# EAGLE board Battery Shield (EAGLE 6.5.0)
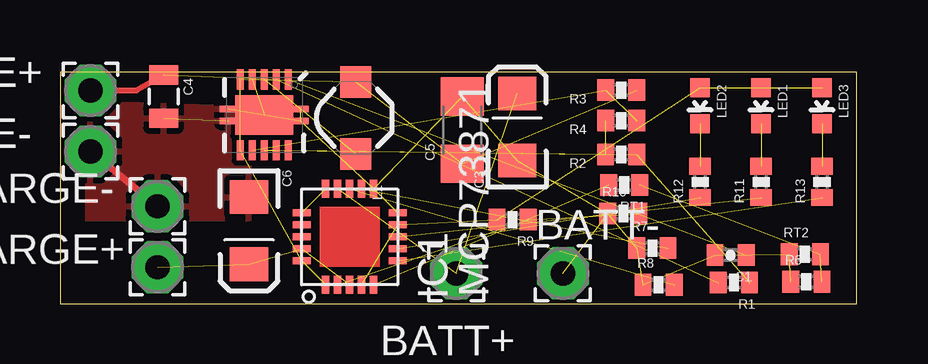
[diagram p0: board, top side]
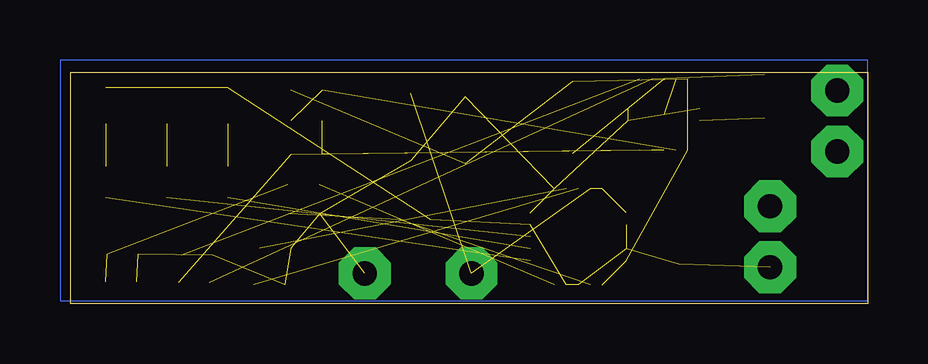
[diagram p1: board, bottom side, seen from below]

Size 33.2 x 9.64 mm. Coordinates in mm from the lower left corner, seen from the top.
Outline: 0,0 33.2,0 33.2,9.64 0,9.64 0,0
Copper layers (1*16): Top 0.035mm / dielectric 1.5mm / Bottom 0.035mm
Design rules "default": minimum track width 10mil, minimum drill 24mil, track to track 8mil, track to pad 8mil, pad to pad 8mil, via to via 8mil, smd to smd 8mil, copper to edge 40mil, drill to drill 8mil, minimum pad ring 10mil, minimum via ring 8mil, stop-mask expansion 4mil, vias tented up to drill 0mil, thermal gap 10mil

## Footprints (pad centres in the part's own frame; a part is rotated, then mirrored left to right if it is on the bottom)
2,15/1,0 = drill 1.016 pad 2.159 octagon: 1 0,0
0402-CAP = smd 0.7 x 0.9: 1 -0.65,0; 2 0.65,0
EIA3216 = smd 1.4 x 1.6: A 1.4,0; C -1.4,0
0805 = smd 0.8 x 1.2: 1 -0.9,0; 2 0.9,0
1206 = smd 1.6 x 1.8: 1 -1.4,0; 2 1.4,0
QFN20 = smd 0.75 x 0.3: 1 -2,1; 2 -2,0.5; 3 -2,0; 4 -2,-0.5; 5 -2,-1; 11 2,-1; 12 2,-0.5; 13 2,0; 14 2,0.5; 15 2,1 | smd 0.3 x 0.75: 6 -1,-2; 7 -0.5,-2; 8 0,-2; 9 0.5,-2; 10 1,-2; 16 1,2; 17 0.5,2; 18 0,2; 19 -0.5,2; 20 -1,2
CDRH2D09 = smd 1.3 x 1.3: P$1 -1.5,0; P$2 1.5,0
LED-0603 = smd 0.8 x 0.8: A 0,-0.75; C 0,0.75
0402-RES = smd 0.7 x 0.9: 1 -0.65,0; 2 0.65,0
QFN-10_PAD = smd 0.297 x 0.85: 1 -1,-1.475; 2 -0.5,-1.475; 3 0,-1.475; 4 0.5,-1.475; 5 1,-1.475; 6 1,1.475; 7 0.5,1.475; 8 0,1.475; 9 -0.5,1.475; 10 -1,1.475 | smd 0.7 x 0.28: 11 -1.5,0.25; 12 -1.5,-0.25; 13 1.5,0.25; 14 1.5,-0.25 | smd 2.4 x 1.65: 15 0,0

## Placement (x,y rotation side)
BATT+  [2,15/1,0]  16.51,1.27 0 top
BATT-  [2,15/1,0]  20.95,1.27 0 top
C1  0.1uF  [0402-CAP]  27.94,2.03 180 top
C3  10uF  [EIA3216]  19.05,7.37 90 top
C4  22uF  [0805]  4.32,8.64 270 top
C5  10uF  [1206]  16.76,7.24 90 top
C6  10uF  [EIA3216]  7.87,3.05 270 top
CHARGE+  [2,15/1,0]  4.06,1.52 0 top
CHARGE-  [2,15/1,0]  4.06,4.06 0 top
IC1  MCP73871  [QFN20]  12.06,2.79 90 top
L1  4.7uH, 1.2A  [CDRH2D09]  12.32,7.75 270 top
LED1  Yellow  [LED-0603]  29.21,8.26 180 top
LED2  Green  [LED-0603]  26.67,8.26 180 top
LED3  Red  [LED-0603]  31.75,8.26 180 top
PHONE+  [2,15/1,0]  1.27,8.89 0 top
PHONE-  [2,15/1,0]  1.27,6.35 0 top
R1  2M  [0402-RES]  28.08,0.89 180 top
R2  220K  [0402-RES]  23.38,6.22 359.9 top
R3  2M  [0402-RES]  23.38,8.91 0 top
R4  220K  [0402-RES]  23.38,7.64 0 top
R6  10K  [0402-RES]  31.1,0.92 0 top
R7  25k  [0402-RES]  24.68,2.32 0 top
R8  1K  [0402-RES]  24.94,0.8 0 top
R9  270K  [0402-RES]  18.86,3.51 180 top
R10  100K  [0402-RES]  23.48,3.76 0 top
R11  1K  [0402-RES]  29.21,5.08 90 top
R12  1K  [0402-RES]  26.67,5.08 90 top
R13  1K  [0402-RES]  31.75,5.08 90 top
RT1  1K  [0402-RES]  23.51,4.95 180 top
RT2  150K  [0402-RES]  31.04,2.06 0 top
U1  TPS61200  [QFN-10_PAD]  8.51,7.87 180 top

## Library data of the parts
BATT+ BATT- CHARGE+ CHARGE- PHONE+ PHONE- = wirepad
C1 C4 L1 R1-R4 R6-R13 RT1 RT2 = SparkFun-Passives
C3 C6 = SparkFun-Capacitors; PROD_ID: CAP-00811
C5 = SparkFun-Capacitors
IC1 = adafruit
LED1-LED3 = SparkFun-LED
U1 = SparkFun-PowerIC; PROD_ID: IC-10035

## Nets
+5V: C4.1 PHONE+.1 R1.2 U1.2
DGND: R2.1 R4.1 U1.8 U1.9
GND: BATT-.1 C1.2 C3.C C4.2 C5.2 C6.C CHARGE-.1 IC1.10 IC1.11 PHONE-.1 R6.1 R7.1 R8.1 R10.1 RT2.1 U1.4 U1.11 U1.12 U1.13 U1.14 U1.15
N$1: L1.P$2 U1.3
N$2: C1.1 U1.1
N$3: R3.1 R4.2 U1.7
N$4: R1.1 R2.2 U1.10
N$5: BATT+.1 C3.A IC1.14 IC1.15 IC1.16
N$6: IC1.8 R11.1
N$7: R6.2 RT1.1 RT2.2
N$8: LED1.C R11.2
N$9: IC1.5 RT1.2
N$10: LED2.C R12.2
N$11: IC1.12 R7.2
N$12: IC1.2 R9.1 R10.2
N$13: IC1.13 R8.2
N$14: IC1.7 R12.1
N$15: IC1.6 R13.1
N$16: LED3.C R13.2
VBATT_OUT: C5.1 IC1.1 IC1.20 L1.P$1 R3.2 U1.5 U1.6
VBUS: C6.A CHARGE+.1 IC1.3 IC1.4 IC1.9 IC1.17 IC1.18 IC1.19 LED1.A LED2.A LED3.A R9.2

## Tracks (layer width: path | path; a pad name or v marks a point on that pad's centre or on a via)
+5V  (2 unrouted)
  Top 0.254: PHONE+.1 3.19,8.89 C4.1
DGND  (3 unrouted)
GND  (16 unrouted)
  Top 0.305: PHONE-.1 CHARGE-.1
  pour Top: 7.87,3.56 7.87,7.87 7.62,8.13 0.25,8.38 0.25,3.56
N$1  (1 unrouted)
N$2  (1 unrouted)
N$3  (2 unrouted)
N$4  (2 unrouted)
N$5  (4 unrouted)
N$6  (1 unrouted)
N$7  (2 unrouted)
N$8  (1 unrouted)
N$9  (1 unrouted)
N$10  (1 unrouted)
N$11  (1 unrouted)
N$12  (2 unrouted)
N$13  (1 unrouted)
N$14  (1 unrouted)
N$15  (1 unrouted)
N$16  (1 unrouted)
N$17
  Bottom 0: 0,0.13 0,10.16 33.66,10.16 33.66,0.13 0,0.13
VBATT_OUT  (6 unrouted)
VBUS  (11 unrouted)